# Altium PCB UC-453.PcbDoc
Units mil, origin at the board's own origin, x right, y up, seen from the top; angles counter-clockwise.
Board outline 4860.15 x 2910.09 mil, 2 copper layers (Top Layer, Bottom Layer); 73 components, 99 nets, 446 pads, 244 vias.
Unrouted connection lines stored in the file: 220.
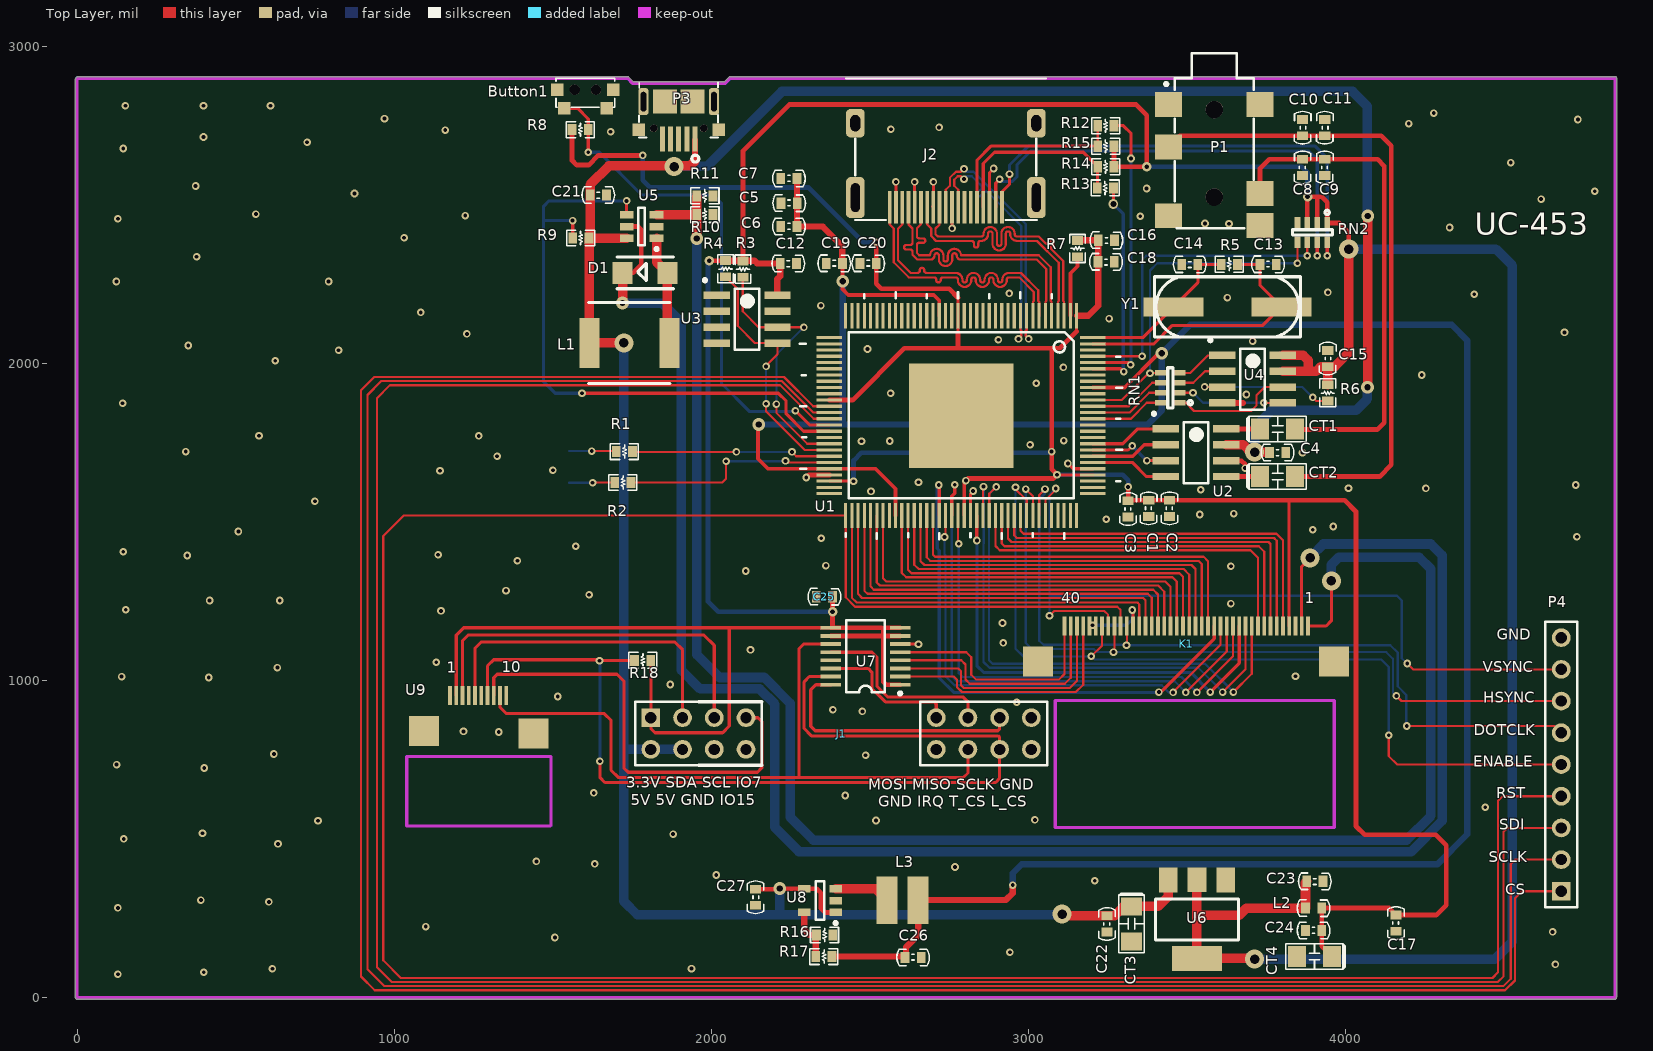
[diagram p0: Top Layer view]
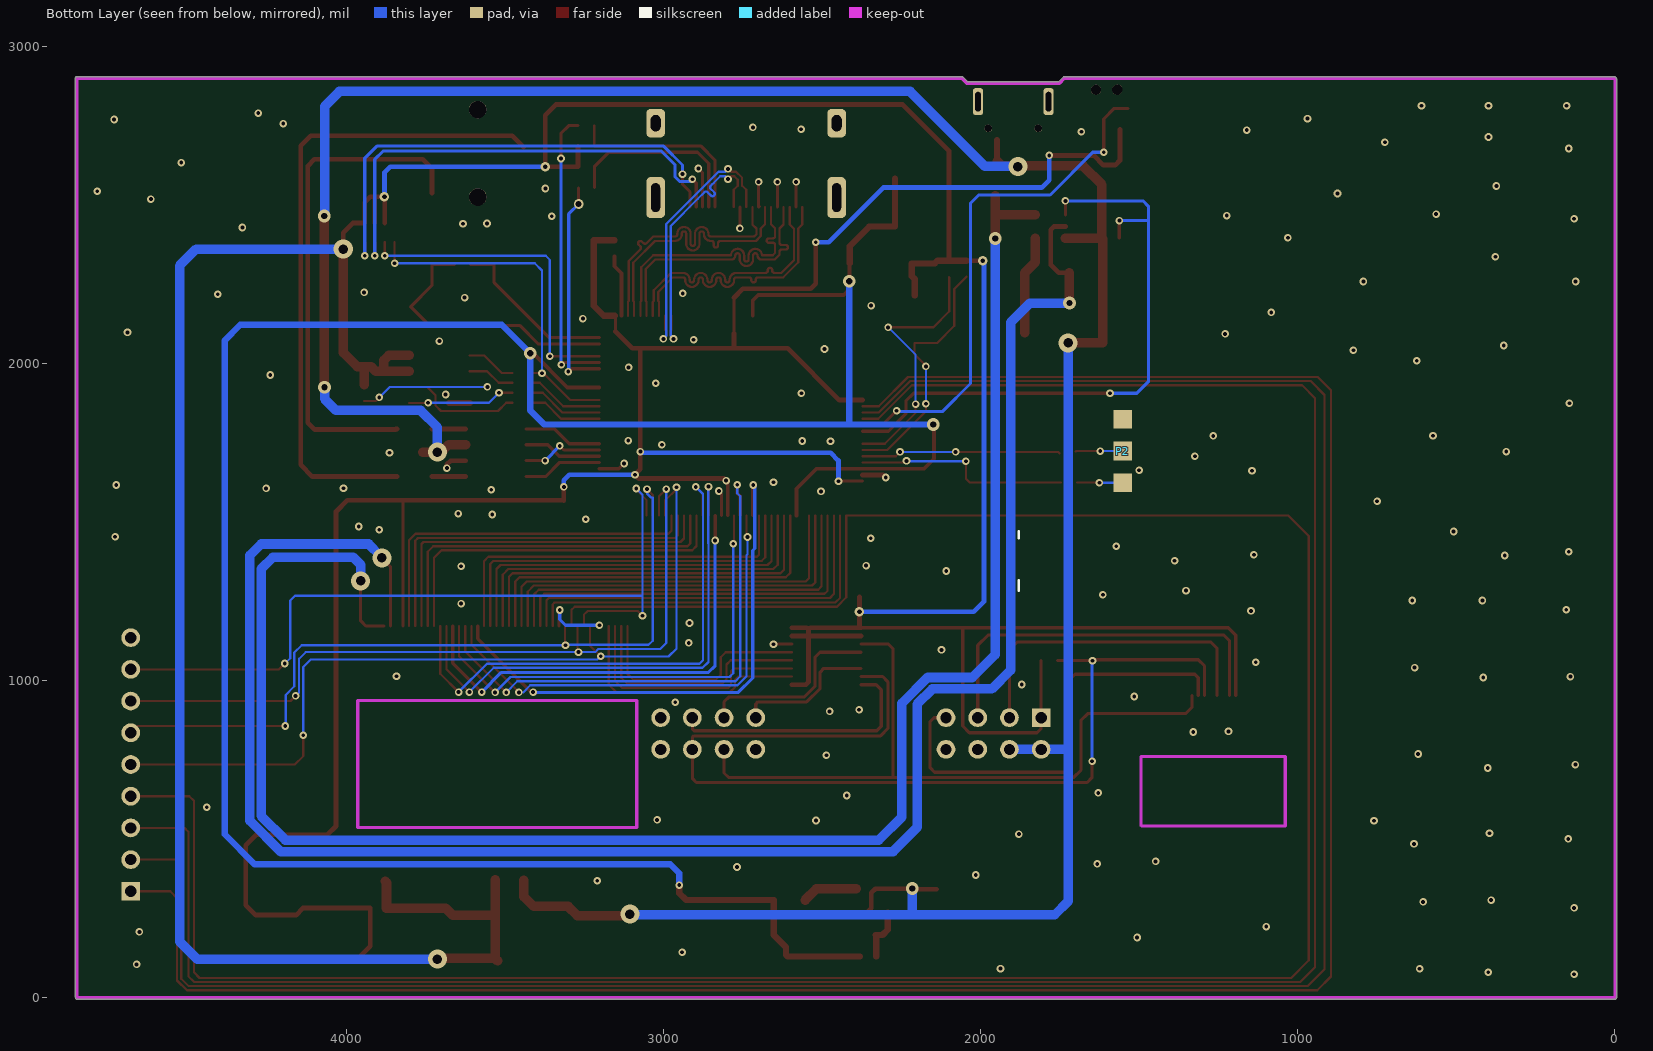
[diagram p1: Bottom Layer view, seen from below]
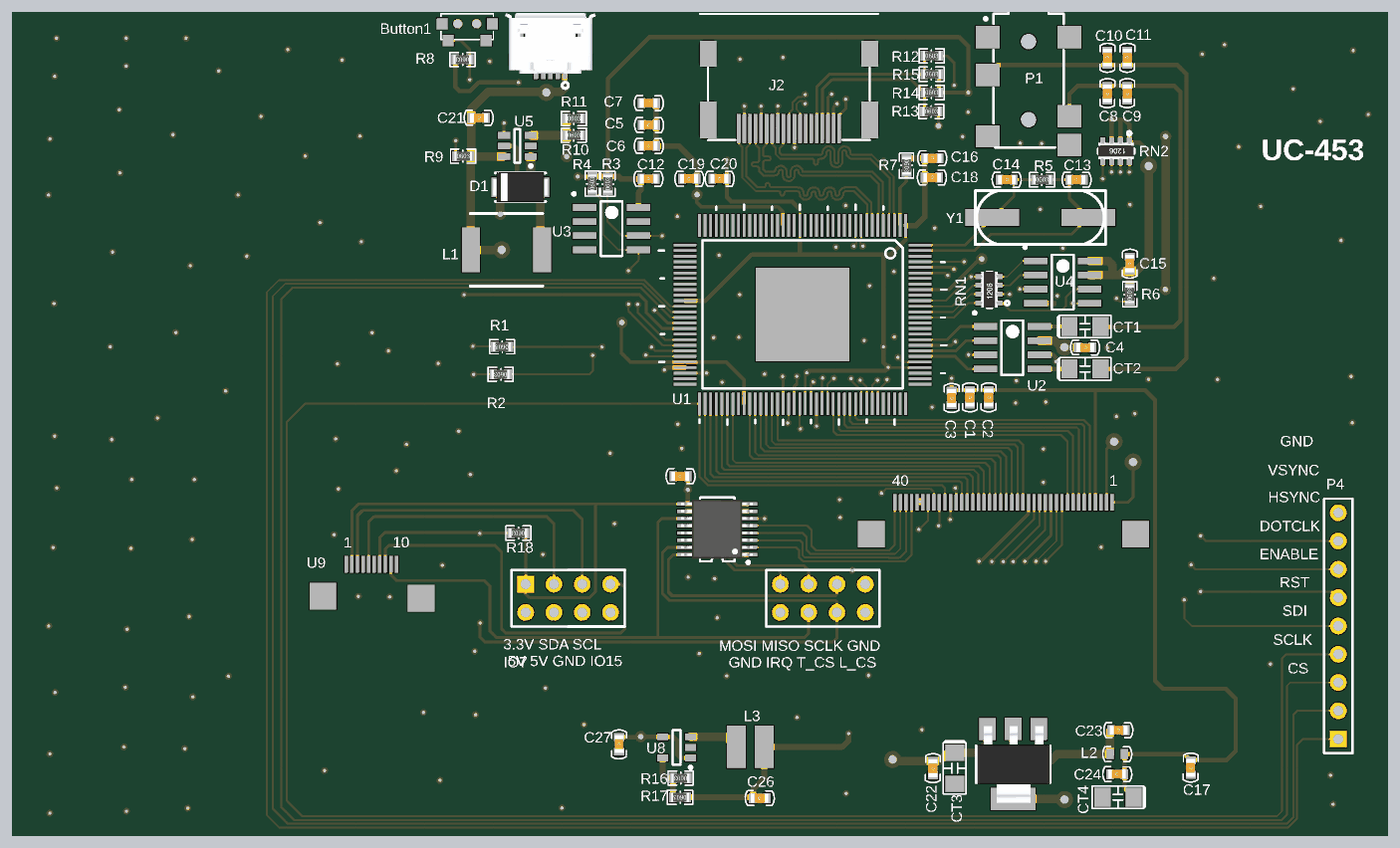
[diagram p2: 3D render of the assembled board from above, using the file's embedded part models]

## Layer stack, top to bottom
Top Layer: signal copper 1.4
Dielectric: core 12.6, FR-4, Dk 4.8
Bottom Layer: signal copper 1.4

## Board outline
-3.53,-3.56 cw(c0,0) -5.01,0 -5.01,2896.85 cw(c0,2896.85) -3.53,2900.41 -3.55,2900.4 -1.51,2902.43 -1.53,2902.41 cw(c2.03,2898.88) 2.03,2903.9 1735.96,2903.9 cw(c1735.96,2898.88) 1739.52,2902.41 1739.5,2902.43 1753.62,2888.32 2041.94,2888.32 2056.05,2902.43 2056.04,2902.41 cw(c2059.6,2898.88) 2059.6,2903.9 4850.12,2903.9 cw(c4850.12,2898.88) 4855.13,2898.88 cw(c4850.12,2898.88) 4855.02,2897.79 4855.02,0 cw(c4850,0) 4853.53,-3.56 4853.55,-3.55 4852.36,-4.73 4852.38,-4.71 cw(c4848.82,-1.18) 4848.82,-6.2 1.18,-6.2 cw(c1.18,-1.18) -2.38,-4.71 -2.36,-4.73

## Design rules (kind name [scope] priority, off if disabled: settings)
Clearance 铺铜安全间距 [InPolygon] p1: gap=12
Clearance [All] p2: gap=6
ComponentClearance [All] p1 off: gap=10 collisioncheckmode=3 verticalgap=10 showdistances=FALSE
DiffPairsRouting [All] p1: maxlimit=7 minlimit=7 mostfreqgap=7 maxuncoupledlength=500
MinimumSolderMaskSliver [All] p1: minsoldermaskwidth=6
PlaneClearance [All] p1: clearance=12
PlaneConnect [All] p1: planeconnectstyle=Direct reliefexpansion=20 reliefentries=4 reliefconductorwidth=10 reliefairgap=10
PolygonConnect VIA [IsVia] p1: connectstyle=Direct reliefconductorwidth=10 reliefentries=4 polygonreliefangle="90 Angle"
PolygonConnect PAD [All] p2: connectstyle=Relief reliefconductorwidth=20 reliefentries=4 polygonreliefangle="90 Angle"
RoutingVias [All] p1: holewidth=12 width=24 viastyle="Through Hole" minholewidth=1 minwidth=1 maxholewidth=100 maxwidth=100
SilkToSilkClearance [All] p1 off: silktosilkclearance=10
SilkscreenOverComponentPads [IsPad] p1 off: minsilkscreentomaskgap=10
SolderMaskExpansion [All] p1: expansion=4
Width [All] p1: maxlimit=80 minlimit=7 preferedwidth=7
21 further rules are at their usual default settings.

## Classes and differential pairs
component class power: Button1 C21 C22 C23 C24 C25 C26 C27 CT3 CT4 D1 J1 J2 K1 L1 L2 L3 P3 P4 R8 R9 R10 R11 R12 R13 R14 R15 R16 R17 R18 U5 U6 U7 U8 U9
component class mcu: C1 C2 C3 C4 C5 C6 C7 C8 C9 C10 C11 C12 C13 C14 C15 C16 C17 C18 C19 C20 CT1 CT2 P1 P2 R1 R2 R3 R4 R5 R6 R7 RN1 RN2 U1 U2 U3 U4 Y1
differential pair HDMI_TX2: +HDMI_TX2_P -HDMI_TX2_N
differential pair HDMI_TX1: +HDMI_TX1_P -HDMI_TX1_N
differential pair HDMI_TX0: +HDMI_TX0_P -HDMI_TX0_N
differential pair HDMI_CLK: +HDMI_CLK_P -HDMI_CLK_N

## Components (designator, comment, footprint, x,y, rotation, side; value= is the part's Value field where it differs from the comment)
Button1 "轻触开关_侧按_2mmX4mm" 轻触开关_侧按_2mmX4mm 1603.12,2862.88 r0 top
C1 "0.1uF" 0603S-CAP 3379.7,1542.71 r90 top
C2 "0.1uF" 0603S-CAP 3445.65,1542.71 r90 top
C3 "0.1uF" 0603S-CAP 3314.82,1540.51 r90 top
C4 "0.1uF" 0603S-CAP 3786.12,1718.88 r180 top
C5 "0.1uF" 0603S-CAP 2245.87,2504.92 r0 top
C6 "0.1uF" 0603S-CAP 2244.88,2431.1 r0 top
C7 "0.1uF" 0603S-CAP 2244.88,2582.68 r0 top
C8 "0.1u NOP" 0603S-CAP 3865.1,2617.88 r90 top
C9 "0.1u NOP" 0603S-CAP 3935.1,2617.88 r90 top
C10 "0.1u NOP" 0603S-CAP 3865.1,2742.88 r270 top
C11 "0.1u NOP" 0603S-CAP 3935.1,2742.88 r270 top
C12 "0.1uF" 0603S-CAP 2243.12,2314.88 r180 top
C13 "22pF" 0603S-CAP 3756.12,2311.88 r0 top
C14 "22pF" 0603S-CAP 3509.12,2311.88 r180 top
C15 "1uF" 0603S-CAP 3944.12,2014.88 r270 top
C16 "1uF" 0603S-CAP 3246.12,2387.88 r180 top
C17 "1uF" 0603S-CAP 4159.45,234.25 r90 top
C18 "1uF" 0603S-CAP 3245.12,2319.88 r180 top
C19 "0.1uF" 0603S-CAP 2388.12,2314.9 r0 top
C20 "0.1uF" 0603S-CAP 2495.12,2314.9 r0 top
C21 "1u" 0603S-CAP 1643.78,2530.87 r180 top
C22 "1u" 0603S-CAP 3248.53,231.95 r90 top
C23 "1u" 0603S-CAP 3903.54,366.14 r180 top
C24 "1u" 0603S-CAP 3899.8,210.83 r0 top
C25 "0.1uF" 0603S-CAP 2357.09,1263.78 r0 top
C26 "10uF" 0603S-CAP 2636.81,125.98 r0 top
C27 "4.7uF/6V3" 0603S-CAP 2139.76,315.94 r270 top
CT1 "10uF/16V" 钽电容（A型） 3786.12,1792.87 r0 top
CT2 "10uF/16V" 钽电容（A型） 3786.12,1642.87 r0 top
CT3 "10uF/16V" 钽电容（A型） 3325.53,231.95 r270 top
CT4 "10uF/16V" 钽电容（A型） 3902.48,129.18 r180 top
D1 "1N5819" SMA 1717.8,2285.2 r0 top
J1 "RASPBERRY PI" HDR2X20 2759.65,832.32 r0 top locked (schematic designator P2)
J2 "47151-1051" 47151-1051 2739.96,2624.88 r180 top
K1 "Con" "ER-TFT028-4 -B" 3497.83,1171.26 r0 top locked
L1 "CDRH74-220R" "CDRH74-220R 7*7*4" 1741.93,2063.98 r270 top
L2 "磁珠" L0603 3899.8,281.69 r0 top
L3 "LPS4018-472MLC" LVF404015N 2603.35,307.09 r180 top
P1 "Header 4" PJ-342 3586.42,2799.88 r270 top
P2 "Header 3" smt1X3 1551.97,1623.03 r90 bottom
P3 "micro USB" FCI_10118194-0001 1897.44,2719.88 r180 top
P4 "Header 9" HDR1X9 4680.91,334.65 r90 top
R1 "33" 0603S-RES 1726.18,1721.46 r180 top
R2 "33" 0603S-RES 1721.26,1624.02 r180 top
R3 "4.7K" 0603S-RES 2100.15,2297.21 r90 top
R4 "4.7K" 0603S-RES 2045.15,2298.21 r90 top
R5 "1M" 0603S-RES 3634.12,2311.88 r0 top
R6 "10K" 0603S-RES 3944.12,1906.88 r90 top
R7 "1K" 0603S-RES 3155.12,2361.88 r270 top
R8 "4.7K" 0603S-RES 1586.71,2736.88 r180 top
R9 "4.7K" 0603S-RES 1588.79,2395 r0 top
R10 "20_1%" 0603S-RES 1980.2,2468.87 r0 top
R11 "20_1% NC" 0603S-RES 1980.2,2527.87 r0 top
R12 "33" 0603S-RES 3244.3,2749.4 r0 top
R13 "33" 0603S-RES 3242.79,2553 r0 top
R14 "10K" 0603S-RES 3244.3,2620.07 r0 top
R15 "10K_NOP" 0603S-RES 3244.3,2684.73 r0 top
R16 "100K" 0603S-RES 2357.28,196.85 r180 top
R17 "200K" 0603S-RES 2355.32,128.94 r180 top
R18 "1K" 0603S-RES 1783.79,1063 r180 top
RN1 "22*4" NC06-4 3477.95,1875.28 r90 top
RN2 "4.7k*4(2.2k*4)" NC06-4 3943.12,2442.88 r180 top
U1 "RTD2660H" LQFP128_P0_5_22X16_EPAD 2788.12,1834.88 r180 top locked
U2 "CS4334-KSZ" SOIC-8N 3529.12,1717.88 r0 top
U3 "24LC16B-I/SN" SOIC-8N 2113.12,2138.88 r0 top
U4 "W25X40BVSNIG" SOIC-8N 3707.12,1949.88 r0 top
U5 "PT4103" SOT23-6N 1780.44,2431.21 r180 top
U6 "AMS1117-3.3V" SOT-223 3531.73,123.11 r0 top
U7 "XPT2046" ADS7843 2595.79,986.39 r270 top
U8 "NCP1529ASNT1G" SOT23-5 2343.14,305.34 r0 top locked
U9 "FT5216" FT5216 1170.08,982.28 r0 top locked
Y1 "27MHZ" XTAL-SMT 3628.12,2177.88 r180 top

## Footprints (in the part's own frame and the unit in brackets; to place one, negate y for a bottom-side part, rotate by r counter-clockwise, add the part's x,y. Pads: shape width x height; smd on the part's side, far side on the other; paste and mask are expansions set on the pad)
0603S-CAP [mm]
  rect 0.7x0.9 smd: 1(-0.65,0) 2(0.65,0)
  silkscreen extent -1.31,-0.67 1.31,0.67, body extent -0.83,-0.4 0.77,0.41, height 0.88
0603S-RES [mm]
  rect 0.7x0.9 smd: 1(-0.65,0) 2(0.65,0)
  silkscreen extent -1.12,-0.64 1.12,0.64, body extent -0.79,-0.39 0.81,0.41, height 0.45
47151-1051 [mm]
  rect 0.3x2.6 smd paste+0.013: 1(4.5,3.36) 2(4,3.36) 3(3.5,3.36) 4(3,3.36) 5(2.5,3.36) 6(2,3.36) 7(1.5,3.36) 8(1,3.36) 9(0.5,3.36) 10(0,3.36) 11(-0.5,3.36) 12(-1,3.36) 13(-1.5,3.36) 14(-2,3.36) 15(-2.5,3.36) 16(-3,3.36) 17(-3.5,3.36) 18(-4,3.36) 19(-4.5,3.36)
  rrect50% 1.5x2.3 hole 0.8 slot 1.3 at 90 deg paste+0.013: 20(-7.25,-3.36) 21(7.25,-3.36)
  rect 1.5x2.3 on Top Paste paste+0.013: 20(-7.25,-3.36) 21(7.25,-3.36)
  rrect50% 1.5x3.3 hole 0.7 slot 2.3 at 90 deg paste+0.013: 22(-7.25,2.6) 23(7.25,2.6)
  rect 1.5x3.3 on Top Paste paste+0.013: 22(-7.25,2.6) 23(7.25,2.6)
  silkscreen extent -8,-6.95 8,4.39
ADS7843 [mm]
  rect 0.3x1.65 smd: 1(0,0) 2(-0.65,0) 3(-1.3,0) 4(-1.95,0) 5(-2.6,0) 6(-3.25,0) 7(-3.9,0) 8(-4.55,0) 9(-4.55,-5.55) 10(-3.9,-5.55) 11(-3.25,-5.55) 12(-2.6,-5.55) 13(-1.95,-5.55) 14(-1.3,-5.55) 15(-0.65,-5.55) 16(0,-5.55)
  silkscreen extent -5.15,-4.33 0.82,0.13, body extent -4.94,-6.02 0.36,0.43, height 1.65
"CDRH74-220R 7*7*4" [mm] "6.0×6.0×4.5"
  rect 4x1.6 smd: 1(0,-3.2) 2(0,3.2)
  silkscreen extent -3.25,-3.25 3.25,3.25
"ER-TFT028-4 -B" [mm]
  rect 0.3x1.5 smd: 1(9.75,0) 2(9.25,0) 3(8.75,0) 4(8.25,0) 5(7.75,0) 6(7.25,0) 7(6.75,0) 8(6.25,0) 9(5.75,0) 10(5.25,0) 11(4.75,0) 12(4.25,0) 13(3.75,0) 14(3.25,0) 15(2.75,0) 16(2.25,0) 17(1.75,0) 18(1.25,0) 19(0.75,0) 20(0.25,0) 21(-0.25,0) 22(-0.75,0) 23(-1.25,0) 24(-1.75,0) 25(-2.25,0) 26(-2.75,0) 27(-3.25,0) 28(-3.75,0) 29(-4.25,0) 30(-4.75,0) 31(-5.25,0) 32(-5.75,0) 33(-6.25,0) 34(-6.75,0) 35(-7.25,0) 36(-7.75,0) 37(-8.25,0) 38(-8.75,0) 39(-9.25,0) 40(-9.75,0)
  rect 2.4x2.4 smd: ""(-11.85,-2.85) ""(11.85,-2.85)
FCI_10118194-0001 [mm] "FCI_101181"
  rect 0.4x2 smd: 1(-1.3,0.33) 2(-0.65,0.33) 3(0,0.33) 4(0.65,0.33) 5(1.3,0.33)
  rect 1x1 smd: 6(-3.2,-0.425) 6(3.2,-0.425)
  rrect50% 0.8x2.15 hole 0.45 slot 1.55 at 90 deg: 6(-2.825,-2.675) 6(2.825,-2.675)
  rect 0.8x2.15 on Top Paste: 6(-2.825,-2.675) 6(2.825,-2.675)
  rect 1.9x1.9 smd: 6(-1.1,-2.675) 6(1.1,-2.675)
  round 0.6 hole 0.6 unplated: 7(-2,-0.525) 7(2,-0.525)
  silkscreen extent -3.16,-4.23 3.19,2.17, body extent -4.1,-4.6 4.1,0.82, height 2.68
FT5216 [mm]
  rect 0.3x1.5 smd: 1(0.156,-0.762) 2(0.656,-0.762) 3(1.156,-0.762) 4(1.656,-0.762) 5(2.156,-0.762) 6(2.656,-0.762) 7(3.156,-0.762) 8(3.656,-0.762) 9(4.156,-0.762) 10(4.656,-0.762)
  rect 2.4x2.4 smd: ""(-1.944,-3.612) ""(6.858,-3.81)
HDR1X9 [mm] "Connector; Header; 9 Position"
  rect 1.5x1.5 hole 0.9: 1(0,0)
  round 1.5 hole 0.9: 2(2.54,0) 3(5.08,0) 4(7.62,0) 5(10.16,0) 6(12.7,0) 7(15.24,0) 8(17.78,0) 9(20.32,0)
  silkscreen extent -1.27,-1.27 21.59,1.27
HDR2X20 [mm] "Connector; Header; 20x2 Posi"
  rect 1.5x1.5 hole 0.9: 1(-24.13,1.27)
  round 1.5 hole 0.9: 2(-24.13,-1.27) 3(-21.59,1.27) 4(-21.59,-1.27) 5(-19.05,1.27) 6(-19.05,-1.27) 7(-16.51,1.27) 8(-16.51,-1.27) 19(-1.27,1.27) 20(-1.27,-1.27) 21(1.27,1.27) 22(1.27,-1.27) 23(3.81,1.27) 24(3.81,-1.27) 25(6.35,1.27) 26(6.35,-1.27)
  silkscreen extent -25.4,-2.54 7.62,2.54
L0603 [mm]
  rect 0.7x0.9 smd: 1(0.65,0) 2(-0.65,0)
  silkscreen extent -1.31,-0.67 1.31,0.67
LQFP128_P0_5_22X16_EPAD [mil]
  rect 10x80 smd: 1(-364.17,-314.96) 2(-344.49,-314.96) 3(-324.8,-314.96) 4(-305.12,-314.96) 5(-285.43,-314.96) 6(-265.75,-314.96) 7(-246.06,-314.96) 8(-226.38,-314.96) 9(-206.69,-314.96) 10(-187.01,-314.96) 11(-167.32,-314.96) 12(-147.64,-314.96) 13(-127.95,-314.96) 14(-108.27,-314.96) 15(-88.58,-314.96) 16(-68.9,-314.96) 17(-49.21,-314.96) 18(-29.53,-314.96) 19(-9.84,-314.96) 20(9.84,-314.96) 21(29.53,-314.96) 22(49.21,-314.96) 23(68.9,-314.96) 24(88.58,-314.96) 25(108.27,-314.96) 26(127.95,-314.96) 27(147.64,-314.96) 28(167.32,-314.96) 29(187.01,-314.96) 30(206.69,-314.96) 31(226.38,-314.96) 32(246.06,-314.96) 33(265.75,-314.96) 34(285.43,-314.96) 35(305.12,-314.96) 36(324.8,-314.96) 37(344.49,-314.96) 38(364.17,-314.96) 65(364.17,314.96) 66(344.49,314.96) 67(324.8,314.96) 68(305.12,314.96) 69(285.43,314.96) 70(265.75,314.96) 71(246.06,314.96) 72(226.38,314.96) 73(206.69,314.96) 74(187.01,314.96) 75(167.32,314.96) 76(147.64,314.96) 77(127.95,314.96) 78(108.27,314.96) 79(88.58,314.96) 80(68.9,314.96) 81(49.21,314.96) 82(29.53,314.96) 83(9.84,314.96) 84(-9.84,314.96) 85(-29.53,314.96) 86(-49.21,314.96) 87(-68.9,314.96) 88(-88.58,314.96) 89(-108.27,314.96) 90(-127.95,314.96) 91(-147.64,314.96) 92(-167.32,314.96) 93(-187.01,314.96) 94(-206.69,314.96) 95(-226.38,314.96) 96(-246.06,314.96) 97(-265.75,314.96) 98(-285.43,314.96) 99(-305.12,314.96) 100(-324.8,314.96) 101(-344.49,314.96) 102(-364.17,314.96)
  rect 80x10 smd: 39(415.35,-246.06) 40(415.35,-226.38) 41(415.35,-206.69) 42(415.35,-187.01) 43(415.35,-167.32) 44(415.35,-147.64) 45(415.35,-127.95) 46(415.35,-108.27) 47(415.35,-88.58) 48(415.35,-68.9) 49(415.35,-49.21) 50(415.35,-29.53) 51(415.35,-9.84) 52(415.35,9.84) 53(415.35,29.53) 54(415.35,49.21) 55(415.35,68.9) 56(415.35,88.58) 57(415.35,108.27) 58(415.35,127.95) 59(415.35,147.64) 60(415.35,167.32) 61(415.35,187.01) 62(415.35,206.69) 63(415.35,226.38) 64(415.35,246.06) 103(-415.35,246.06) 104(-415.35,226.38) 105(-415.35,206.69) 106(-415.35,187.01) 107(-415.35,167.32) 108(-415.35,147.64) 109(-415.35,127.95) 110(-415.35,108.27) 111(-415.35,88.58) 112(-415.35,68.9) 113(-415.35,49.21) 114(-415.35,29.53) 115(-415.35,9.84) 116(-415.35,-9.84) 117(-415.35,-29.53) 118(-415.35,-49.21) 119(-415.35,-68.9) 120(-415.35,-88.58) 121(-415.35,-108.27) 122(-415.35,-127.95) 123(-415.35,-147.64) 124(-415.35,-167.32) 125(-415.35,-187.01) 126(-415.35,-206.69) 127(-415.35,-226.38) 128(-415.35,-246.06)
  rect 330x330 smd: 129(0,0)
  silkscreen extent -508,-389 508,390
LVF404015N [mm] "Precision Wire Wound Inductor, 2-Leads, Body 4.0x4.0mm, IPC Medium Density"
  rect 1.7x3.8 smd: 1(-1.25,0) 2(1.25,0)
  body extent -2,-2 2,2, height 2
NC06-4 [mil]
  rect 18x36 smd: 1(0.4,0.16) 2(31.9,0.16) 3(63.39,0.16) 4(94.4,0.16) 5(94.4,61.16) 6(63.39,61.16) 7(31.9,61.16) 8(0.4,61.16)
  silkscreen extent -16,-40 110,38, body extent -15,-2 111,61, height 20
PJ-342 [mm]
  rect 2x2.15 smd: 1(-0.4,-3.675) 2(6.7,3.675) 3(3,-3.675) 4(-0.4,3.675) 10(9.3,3.675) 11(8.5,-3.675)
  round 1.4 hole 1.4 unplated: MH1(0,0) MH2(7,0)
  silkscreen extent -4.5,-3.97 9.5,3.15, body extent -4.45,-3 9.52,3, height 4.87
SMA [mm]
  rect 1.6x1.75 smd: A(3.655,0) K(0.075,0)
  silkscreen extent -0.38,-1.28 4.13,1.28, body extent -0.64,-1.35 4.36,1.35, height 2.15
smt1X3 [mm] "Connector; Header; 3 Position"
  rect 1.5x1.5 smd: 1(0,0) 2(2.54,0) 3(5.08,0)
SOIC-8N [mm] "SOIC, 8-Leads, Body 4.9x3.9mm (max), Pitch 1.27mm, IPC Medium Density"
  rect 2.1x0.6 smd: 1(-2.425,1.905) 2(-2.425,0.635) 3(-2.425,-0.635) 4(-2.425,-1.905) 5(2.425,-1.905) 6(2.425,-0.635) 7(2.425,0.635) 8(2.425,1.905)
  silkscreen extent -3.5,-2.45 0.98,3.25, body extent -1.95,-2.45 1.95,2.45, height 1.75
SOT23-5 [mm] "SOT23, 5-Leads, Body 3.1x3.0mm (max), Pitch 0.95mm, IPC Medium Density"
  rect 1x0.6 smd: 1(1.25,-0.95) 2(1.25,0) 3(1.25,0.95) 4(-1.25,0.95) 5(-1.25,-0.95)
  silkscreen extent -0.35,-1.92 1.38,1.55, body extent -0.9,-1.55 0.9,1.55, height 1.1
SOT23-6N [mm] "SOT23, 6-Leads, Body 3.0x3.0mm (max), Pitch 0.95mm, IPC Medium Density"
  rect 1.1x0.6 smd: 1(-1.2,0.95) 2(-1.2,0) 3(-1.2,-0.95) 4(1.2,-0.95) 5(1.2,0) 6(1.2,0.95)
  silkscreen extent -1.33,-1.5 0.25,1.92, body extent -0.85,-1.5 0.85,1.5, height 1.45
SOT-223 [mm] "TSOP, 44-Leads, Body 18.4x10.2mm (max), Pitch 0.80mm, IPC Mediu"
  rect 1.5x2 smd: 1(2.3,6.275) 2(0,6.3) 3(-2.3,6.275)
  rect 4x2 smd: 2(0,0)
  silkscreen extent -3.32,1.48 3.32,4.75, body extent -3.2,-0.36 3.3,6.54, height 1.72
XTAL-SMT [mil]
  rect 190x60 smd: 1(-170,0) 2(170,0)
  silkscreen extent -230,-95 230,95
轻触开关_侧按_2mmX4mm [mm]
  round 0.8 hole 0.82: 0(-0.85,0) 0(0.85,0)
  rect 1x1 smd: 1(-2.25,0) 2(2.25,0) 3(-1.7,-1.5) 4(1.7,-1.5)
  silkscreen extent -2.35,-1.4 2.35,0.9, body extent -2.16,-1.52 2.16,1.52, height 0.76
钽电容（A型） [mm]
  rect 1.45x1.7 smd: 1(-1.397,0) 2(1.397,0)
  silkscreen extent -2.46,-1.02 2.31,1.02

## Part data
C1 C2 C3 C4 C5 C6 C7 C8 C9 C10 C11 C13 C14 C15 C16 C17 C18 C19 C20 C21 C23 C24 C25: library part Cap, "50V/8.2u/0805"
C12: library part "CAP SMT 0.1uF 16V X7R", "CAP SMT 0.1uF 16V X7R"
C22 C26 C27: library part Cap, "Capacitor"
CT1 CT2 CT3 CT4: library part "Cap Pol2", "Polarized Capacitor (Axial)"
D1: library part "Diode BAT17", "Silicon RF Schottky Diode for Mixer Applications in the VHF/UHF Range"
J2: library part CON_HDMI_RA, "HDMI Con, RA, SMT with PTH lugs"
L1 L3: library part Inductor, "Inductor"
L2: library part RES
P1: "Header, 4-Pin"
P2: "Header, 3-Pin"
P3: library part 0481900001, "Connector Receptacle USB - micro AB 2.0 5 Position Through Hole, Vertical"
P4: "Header, 9-Pin"
R1 R2 R3 R4 R5 R6 R7 R8 R9 R10 R11 R12 R13 R14 R15 R16 R17 R18: library part Res2, "Resistor"
RN1 RN2: library part RN4
U1: library part RTD2523_10
U3: library part 24LC64-I/SN, "IC EEPROM 64KBIT 400KHZ 8SOIC"
U4: library part 24C08_1
U6: library part AMS1117
U7: library part ADS7843
Y1: library part "XTAL 32.768KHZ", "Crystal, CRYSTAL 32.768KHZ 6PF SMD"

## Via types
v1: diameter 24, hole 12, Top Layer to Bottom Layer, tented both sides, 223 vias
v2: diameter 60, hole 30, Top Layer to Bottom Layer, tented both sides, 8 vias
v3: diameter 40, hole 20, Top Layer to Bottom Layer, tented both sides, 8 vias
v4: diameter 30, hole 15, Top Layer to Bottom Layer, tented both sides, 4 vias
v5: diameter 30, hole 20, Top Layer to Bottom Layer, tented both sides, 1 vias

## Nets (pads, with @x,y where several pads share a name; then routed paths per layer and width w, separated by ;. In a path a pad name is that pad's centre, name@x,y a point inside that pad or via, vN(x,y) a via of type N, cw(c..) or ccw(c..) an arc to the next point about the centre after c; other vN are vias at no path point)
1V8_VCC: C5.2 C6.2 C7.2 C19.2 C26.1 L3.1 R17.1 U1.23 U1.60 U1.73 U1.120 | length 8499.3
  Top Layer w12: v3(2149.41,1807.09) 2147.71,1805.39 2147.71,1698.75 2178.9,1667.56 U1.60 2518.27,1667.56 2581.43,1604.4 U1.73 ; v3@2413.71,2241.87 2413.71,2233.73 2431.91,2215.53 2701.86,2215.53 2719.22,2198.17 U1.23 ; v3@2413.71,2259.12 C19.2 ; U1.120 3303.91,1923.47 v3@3412.33,2031.88
  Top Layer w20: C7.2 C6.2 2352.17,2431.1 2413.71,2369.56 C19.2 ; R17.1 2608.27,128.94 2614.17,134.84 2614.17,158.46 2652.56,196.85 L3.1 2929.13,307.09 2950.79,328.74 v1(2950.79,354.33)
  Bottom Layer w20: v3(2149.41,1807.09) 3376.97,1807.09 3421.06,1851.18 v3(3421.06,2031.88) 3510.24,2121.06 4335.63,2121.06 4384.84,2071.85 4384.84,514.76 4290.35,420.28 2979.33,420.28 2950.79,391.73 v1(2950.79,354.33) ; 2415.16,1815.22 v3(2415.16,2259.12)
3V3_VCC: C1.2 C2.2 C3.2 C16.2 C17.2 C18.2 C20.2 C24.2 CT4.1 K1.4 L2.1 R7.1 R8.2 U1.1 U1.20 U1.49 U1.62 U1.84 U1.106 | length 8264.7
  Top Layer w10: U1.62 v1(2448.86,1628.19) ; 2778.28,2094.49 U1.20 2778.28,2206.69 ; U1.84 2797.96,1624.73 v1(2803.15,1629.92) ; v1@3091.3,1647.88 U1.106 ; 3152.29,2100.32 U1.1 ; K1.4 3822.64,1567.15
  Top Layer w15: R8.2 1561.12,2639.47 1575.59,2625 1613.98,2625 1644.49,2655.51 v1(1784.25,2655.51) ; U1.49 2445.91,1884.1 2609.06,2047.24 3073.62,2047.24 ; v1(2520.71,2381.65) C20.2 2520.71,2250.75 2536.43,2235.03 2749.94,2235.03 2778.28,2206.69 ; 2778.28,2049.28 2778.28,2094.49 ; v1(2803.15,1629.92) 2809.73,1636.5 3078.43,1636.5 v1(3090.55,1648.62) ; v1@3091.3,1647.88 v1(3090.55,1648.62) ; 3152.29,2100.32 3099.21,2047.24 3073.62,2047.24 ; C3.2 v1(3314.82,1610.24) ; C3.2@3317.02,1568.3 C1.2 C2.2 3997.65,1568.3 4033.47,1532.48 4033.47,540.35 4061.02,512.8 4284.45,512.8 4317.91,479.33 4317.91,291.34 4286.42,259.84 C17.2 4137.6,281.69 L2.1 C24.2 3925.39,161.27 CT4.1 ; 3073.62,2047.24 v1(3073.62,1721.46) 3073.62,1665.55 v1(3090.55,1648.62)
  Top Layer w20: U1.1@3154.61,2149.84 3189.02,2149.84 3220.12,2180.94 3220.12,2387.47 R7.1
  Bottom Layer w15: v1(1784.25,2655.51) 1784.25,2577.95 1808.07,2554.13 2306.89,2554.13 2479.37,2381.65 v1(2520.71,2381.65) ; v1(2448.86,1628.19) 2448.86,1692.95 2473.43,1717.52 2995.21,1717.52 3069.67,1717.5 v1(3073.62,1721.46) ; v1(3090.55,1648.62) 3297.24,1648.62 3314.82,1631.05 v1(3314.82,1610.24)
3V3_VO: C12.2 C15.2 C23.2 C25.2 J1.1 L2.2 R3.2 R4.2 R6.2 R14.2 R15.2 R18.1 RN2.1 RN2.2 RN2.3 U3.8 U4.7 U4.8 U6.2 U7.1 U7.7 U7.8 U7.9 U7.10 U9.2 | length 12879.3
  Top Layer w10: U9.2 1195.91,1142.12 1219.79,1166 2056.79,1166 ; R18.1@1809.65,1062.73 J1.1 1809.65,848.14 1822.79,835 2035.79,835 2056.79,856 2056.79,1166 ; U7.9@2382.68,1170.92 2377.76,1166 2056.79,1166
  Top Layer w15: v4(1993.79,2323) R4.2@2044.35,2323 ; R3.2 2100.15,2323.8 2100.15,2669.36 2246.73,2815.94 3339.85,2815.94 3373.55,2782.24 v4(3373.55,2620.07) R14.2 R15.2 ; U7.10 2543.56,1139.94 ; U7.9 2537.72,1165.53 ; U7.9@2382.68,1170.92 v4(2382.68,1216) C25.2 ; 2548.54,1139.94 U7.7 ; U7.1 2551.39,986.39 2543.62,994.17 2543.62,1159.62 2549.53,1165.53 U7.8 ; RN2.3 v4@3879.72,2523.88 ; v4(3880.71,2524.87) 3911.22,2524.87 ; RN2.2 3911.22,2524.87 ; v2(4010.63,2360.24) 4010.63,2411.68 3979.59,2442.72 RN2.1 3942.72,2507.15 3925,2524.87 3911.22,2524.87
  Top Layer w20: R4.2 2100.15,2323.8 2136.63,2323.8 2145.55,2314.88 C12.2 2217.53,2274.81 2208.59,2265.87 U3.8
  Top Layer w30: U6.2@3523.83,115.2 U6.2@3531.73,123.11 ; U6.2@3531.73,371.14 3531.73,259.57 ; v2@3711.54,123.11 U6.2@3531.73,123.11 ; U4.7 3908.62,1974.88 3923.03,1989.29 C15.2 ; U4.8 3866.93,2024.88 3882.69,2009.12 3882.69,1986.5 ; C23.2 3874.21,362.4 L2.2 3687.95,281.69 3665.83,259.57 3531.73,259.57 ; R6.2 C15.2 ; v2(4010.63,2360.24) 4010.63,2033.46 3966.46,1989.29 C15.2 ; U6.2@3531.73,123.11 3531.73,259.57
  Bottom Layer w15: v4@1989.79,2319 1989.79,1249 2022.79,1216 v4@2381.68,1216 ; v4(3373.55,2620.07) 3862.22,2620.07 3880.71,2601.57 v4(3880.71,2524.87)
  Bottom Layer w30: v2(3713.58,121.06) 4471.46,121.06 4526.57,176.18 4526.57,2308.07 4474.65,2360 4010.63,2360 v2@4012.63,2362
5V0: C4.2 C21.2 C22.2 C27.1 CT3.1 J1.2 J1.4 L1.1 P3.1 R9.2 U2.7 U5.6 U6.3 U8.1 U8.4 | length 9141.8
  Top Layer w15: C27.1 v3@2216.09,341.53 ; v3@2217.3,342.74 U8.4 2332.02,342.74 2345.24,329.52 2345.24,281.29 2358.6,267.94 U8.1
  Top Layer w20: 1948.62,2637.8 P3.1@1948.62,2703.6
  Top Layer w30: R9.2@1615.94,2392.72 L1.1 v2@1722.81,2063.98 ; U5.6 1623.2,2393.8 1618.19,2398.81 C21.2 1618.19,2563.27 1677.23,2622.31 1933.14,2622.31 1948.62,2637.8 ; v2(3106.3,262.8) 3111.56,257.54 C22.2 3272.2,257.54 3301.61,286.95 CT3.1 3409.93,286.95 3441.18,318.2 U6.3 ; U2.7 3678.44,1742.88 3702.44,1718.88 C4.2 ; v3(4069.69,1924.21) 4070.67,1925.2 v3(4070.67,2464.57)
  Bottom Layer w30: v2(1724.79,2064) 1724.79,302.77 1766.73,260.83 2216.54,260.83 ; 1725.61,782.32 J1.2 J1.4 ; v2(1882.68,2620.34) 1884.38,2622.05 1987.73,2622.05 2222.97,2857.28 4022.5,2857.28 4069.69,2810.1 v3@4069.69,2464.57 ; v3(2216.54,343.5) 2216.54,260.83 ; v2(3106.3,262.8) 3104.33,260.83 2216.54,260.83 ; v2(3713.39,1719.75) 3713.39,1798.03 3766.73,1851.38 4033.46,1851.38 4069.69,1887.6 v3(4069.69,1924.21)
#3-SDA-GPIO8: J1.3 U9.5 | length 1035.9
  Top Layer w10: U9.5 1254.96,1101.17 1274.79,1121 1884.79,1121 1909.65,1096.14 J1.3
#5-SCL-GPIO9: J1.5 U9.3 | length 1215.5
  Top Layer w10: U9.3 1215.59,1124.8 1233.79,1143 1976.79,1143 2009.65,1110.14 J1.5
#7-GPIO7: J1.7 U9.8 | length 1401.6
  Top Layer w10: U9.8 1314.02,1008.23 1324.79,1019 1702.79,1019 1724.79,997 1724.79,723 1737.79,710 2145.79,710 2159.65,723.86 2159.65,870.14 2147.47,882.32 J1.7
#8-GPIO15: J1.8
"#19 -MOSI-GPIO12": J1.19 U7.14 | length 453.8
  Top Layer w10: U7.14 2495.21,1037.57 2506.79,1026 2506.79,974.37 2549.16,932 2702.79,932 2709.65,925.14 J1.19 J1.19@2709.65,884.14
#21-MISO-GPIO13: J1.21 U7.12 | length 601
  Top Layer w10: U7.12 2507.03,1088.76 2522.79,1073 2522.79,981 2555.79,948 2793.79,948 2809.65,932.14 J1.21
#22-IRQ-GPIO6: J1.22 U7.11 U9.9 | length 2288.9
  Top Layer w10: U9.9 1333.7,915.09 1352.79,896 ; 1352.79,895.09 1662.7,895.09 1683.79,874 1683.79,717 1706.79,694 2276.79,694 ; U7.11 2291.13,1114.35 2276.79,1100 2276.79,694 ; J1.22 2809.65,707.86 2795.79,694 2276.79,694
#23-SCLK-GPIO14: J1.23 U7.16 | length 824.8
  Top Layer w10: U7.16 2330.18,986.39 2313.79,970 2313.79,855 2327.79,841 2903.79,841 2909.65,846.86 J1.23
#24-CE0-GPIO10: J1.24 R18.2 U7.15 U9.7 | length 3206.6
  Top Layer w10: U9.7 1294.33,1045.54 1313.79,1065 v1@1646.79,1065 ; v1@1648.79,740 1648.79,694 1664.79,678 2896.79,678 2909.65,690.86 J1.24 ; v1@1648.79,1063 R18.2 ; U7.15 2309.77,1011.98 2292.79,995 2292.79,848 2315.79,825 2904.79,825 2909.65,820.14 J1.24 ; J1.24@2918.37,773.59 J1.24
  Bottom Layer w10: v1(1648.79,745) v1@1648.79,1061
  other v1: 1647.79,1062
#26-CE1-GPIO11: J1.26
CE: RN1.4 U4.1 | length 156.7
  Top Layer w7: RN1.4@3477.95,1969.28 3511.15,1969.28 3566.75,2024.88 U4.1
CLK: RN1.1 U4.6 | length 383.1
  Top Layer w7: RN1.1@3477.95,1875.28 3496.83,1875.28 3522.44,1849.67 3702.56,1849.67 3719.29,1866.4 3719.29,1898.88 ; 3720.94,1900.53 3745.29,1924.88 U4.6
EE_CE: RN1.5 RN2.5 U1.118 | length 1113.5
  Top Layer w7: U1.118 3295.06,1884.1 3380.24,1969.28 RN1.5@3416.95,1969.28 ; v1(3848.72,2315.22) RN2.5
  Bottom Layer w7: v1(3383.66,1968.77) 3383.66,2292.58 3406.3,2315.22 v1(3848.72,2315.22)
EE_CLK: RN1.8 U1.115 | length 234.3
  Top Layer w7: U1.115 3323.6,1825.04 3373.84,1875.28 RN1.8@3416.95,1875.28
EE_SDIN: RN1.7 U1.116 | length 239.2
  Top Layer w7: U1.116 3319.66,1844.73 3381.72,1906.78 RN1.7@3416.95,1906.78
EE_SDOUT: RN1.6 U1.117 | length 244.1
  Top Layer w7: U1.117 3316.71,1864.41 3390.57,1938.28 RN1.6@3416.95,1938.28
GND: Button1.1 Button1.2 Button1.4 C1.1 C2.1 C3.1 C4.1 C5.1 C6.1 C7.1 C8.1 C9.1 C10.1 C11.1 C12.1 C13.2 C14.2 C15.1 C16.1 C17.1 C18.1 C19.1 C20.1 C21.1 C22.1 C23.1 C24.1 C25.1 C26.2 C27.2 CT3.2 CT4.2 J1.6 J1.20 J1.25 J2.2 J2.5 J2.8 J2.11 J2.17 J2.20@3025.39,2757.17 J2.21@2454.53,2757.17 J2.22@3025.39,2522.52 J2.23@2454.53,2522.52 K1.3 K1.29 K1.35 K1.36 P1.1 P1.4 P2.3 P3.5 P3.6@1771.46,2736.62 P3.6@1786.22,2825.2 P3.6@1854.13,2825.2 P3.6@1940.75,2825.2 P3.6@2008.66,2825.2 P3.6@2023.43,2736.62 P4.9 R10.2 R11.2 R16.1 RN2.4 U1.11 U1.38 U1.61 U1.85 U1.107 U1.129 U2.6 U3.1 U3.2 U3.3 U3.4 U3.7 U4.4 U5.2 U6.1 U7.6 U8.2 U9.1 U9.4 U9.6 U9.10 | length 1089.9
  Top Layer w10: J2.2 2582.48,2572.83 v1(2582.48,2571.85) ; U7.6 v1@2653.44,1114.35 ; J2.5 v1(2641.54,2571.85) ; J2.8 2698.62,2494.57 2700.59,2496.54 v1(2700.59,2571.85) ; v1(2759.65,2425.2) J2.11 ; U1.85 2817.65,1588.86 v1(2825.79,1597) ; J2.17 2877.76,2601.38 v1(2890.55,2614.17) ; v1(3124.8,1684.06) 3141.3,1667.56 U1.107 ; v1(3327.79,1222) 3330.51,1219.28 K1.29
  Top Layer w15: v1(2300,1639.76) 2308.11,1647.88 U1.61 ; U2.6 3672.08,1692.88 3683.86,1681.1 v1(3683.86,1669.29)
  Top Layer w20: U4.4 3675.87,1874.88
  Bottom Layer w10: v1(3202.79,1174) 3309.79,1174 3327.79,1192 v1(3327.79,1222)
  other v1: 128.74,72.83 399.41,79.72 615.94,90.55 1937.79,91 4662.2,104.33 2941.93,142.72 1506.89,188.98 4653.35,206.69 1099.41,223.43 128.74,282.48 605.12,301.18 390.55,307.09 3209.65,368.11 2015.79,386 2768.7,411.42 1632.79,421 1448.79,429 633.66,484.25 147.44,500 1879.79,515 395.47,517.72 759.79,557 2519.79,558 3020.79,560 4440.79,600 2422.79,637 1629.79,645 401.38,723.43 124.8,734.25 2486.79,764 620.87,767.72 1329.79,837 1218.79,839 2476.79,902 2383.79,907 2963.79,931 1515.79,949 1870.79,987 415.16,1008.86 140.55,1011.81 3842.79,1013 631.69,1040.35 1132.79,1057 2123.79,1096 2653.79,1114 2920.79,1118 2918.79,1181 1147.79,1219 153.35,1222.44 3638.79,1242 418.11,1251.97 639.57,1251.97 1614.79,1270 1352.79,1283 2108.79,1345 3638.79,1360 2361.79,1362 1388.79,1377 347.44,1393.7 1138.79,1396 145.67,1405.51 1572.79,1423 2346.79,1448 4730.12,1452.76 508.86,1469.49 3896.79,1475 3961.61,1485.24 3245.79,1508 3540.79,1523 3647.79,1526 750,1564.96 2503.79,1596 3543.79,1601 4253.94,1605.32 4009.79,1606 4726.18,1616.14 2653.54,1625 1144.79,1661 1500.79,1662.4 1324.79,1707 3864.79,1718 342.52,1721.46 3005.79,1743 2473.79,1754 2562.8,1754.92 3111.79,1756 573.82,1771.65 1266.79,1771 143.7,1874.02 3687.8,1901.57 2565.75,1905.51 3024.79,1937 4240.79,1963 3110.79,1987 625,2007.87 824.8,2041.34 2492.79,2045 350.39,2056.1 3707.48,2069.88 2905.79,2074 1229.33,2092.52 4690.94,2097.44 3254.79,2141 1083.66,2160.43 2345.79,2182 3627.79,2207 4406.5,2217.52 2939.76,2220.47 3944.88,2223.43 124.02,2257.87 793.31,2257.87 376.97,2335.63 1031.5,2395.67 4328.74,2428.15 3632.87,2439.96 3557.09,2440.94 128.94,2455.71 3353.35,2463.58 1224.41,2465.55 563.98,2470.47 4617.13,2517.72 875,2535.43 4786.42,2542.32 3373.03,2551.18 374.02,2559.06 4521.65,2632.87 145.67,2677.17 725.39,2696.85 398.62,2713.58 1682.79,2730 1161.42,2735.24 2566.79,2738 2718.79,2744 4199.8,2755.91 4733.27,2768.7 969.49,2771.65 4278.79,2789 152.56,2812.01 398.62,2812.01 610.24,2812.01
HDMI_5V: J2.18 RN2.7 | length 1514.8
  Top Layer w10: J2.18 2897.44,2568.17 v1@2908.76,2579.49 ; v1@3911.22,2339.83 RN2.7
  Bottom Layer w10: v1(2909.39,2580.12) 2915.8,2573.72 2950.27,2573.72 2964.37,2587.81 2964.37,2626.26 3007.04,2668.93 3885.2,2668.93 3911.22,2642.91 v1(3911.22,2338.84)
HDMI_CLK_N: J2.12 U1.10 | length 864.1
  Top Layer w7: J2.12 2779.33,2547.38 2766.65,2560.06 2766.65,2578.88 2777.65,2589.88 2788.12,2589.88 v1(2797.12,2580.88) ; v1(2968.97,2076.88) 2977.97,2085.88 2977.97,2102.53 2975.13,2105.38 U1.10
  Bottom Layer w7: v1(2797.12,2580.88) 2806.12,2589.88 2821.32,2589.88 2841.72,2569.48 2846.67,2564.53 2851.62,2559.58 cw(c2846.67,2554.63) 2851.62,2549.68 2840.87,2538.93 ccw(c2845.82,2533.98) 2840.87,2529.03 ccw(c2845.82,2533.98) 2850.77,2529.03 2861.52,2539.78 cw(c2866.47,2534.83) 2871.42,2539.78 2892.72,2518.48 2977.97,2433.23 2977.97,2085.88 v1(2968.97,2076.88)
HDMI_CLK_P: J2.10 U1.9 | length 864.1
  Top Layer w7: J2.10 2739.96,2547.38 2752.65,2560.06 2752.65,2584.68 2771.85,2603.88 2788.12,2603.88 v1(2797.12,2612.88) ; U1.9 2994.81,2105.38 2991.97,2102.53 2991.97,2085.88 v1(3000.97,2076.88)
  Bottom Layer w7: v1(2797.12,2612.88) 2806.12,2603.88 2827.12,2603.88 2991.97,2439.03 2991.97,2085.88 v1(3000.97,2076.88)
HDMI_PLUG_DET: J2.19 RN2.8 | length 1535.8
  Top Layer w10: J2.19 2917.13,2540.62 2940.75,2564.24 v1(2940.75,2596.72) ; v1(3942.72,2338.84) RN2.8
  Bottom Layer w10: v1(2940.75,2596.72) 2940.75,2625.26 3000.42,2684.93 3904.64,2684.93 3942.72,2646.85 v1(3942.72,2338.84)
HDMI_SCL: R12.2 U1.124 | length 930.9
  Top Layer w10: U1.124 3315.77,2002.21 v1(3322.64,1995.34) ; R12.2 3299.88,2749.4 3323.75,2725.53 3323.75,2709.9 ; v1@3323.75,2646.17 3323.75,2709.9 ; 3323.75,2694.28 3323.75,2709.9
  Bottom Layer w10: v1(3322.64,1995.34) 3323.98,1996.69 v1@3323.98,2644.95
  other v1: 3323.98,2645.93
HDMI_SDA: R13.2 U1.123 | length 692.4
  Top Layer w10: U1.123 3291.17,1982.52 v1@3300,1973.69 ; v5@3267.38,2503.41 v5(3268.5,2502.28) ; v5@3268.38,2504.41 R13.2
  Bottom Layer w10: v5(3268.5,2502.28) 3299.64,2471.15 3299.64,1975.03 v1(3300.98,1973.69)
HDMI_TX0_N: J2.9 U1.3 | length 864.1
  Top Layer w7: J2.9 2720.28,2437.38 2707.59,2424.69 2707.59,2407.21 2714.92,2399.88 2852.12,2399.88 ccw(c2852.12,2406.88) 2859.12,2406.88 2859.12,2408.88 cw(c2880.12,2408.88) 2901.12,2408.88 2901.12,2376.88 ccw(c2908.12,2376.88) 2915.12,2376.88 2915.12,2408.88 cw(c2936.12,2408.88) 2957.12,2408.88 2957.12,2406.88 ccw(c2964.12,2406.88) 2964.12,2399.88 3032.92,2399.88 3053.93,2378.87 ccw(c3058.88,2383.82) 3063.83,2378.87 3068.78,2383.82 cw(c3073.73,2378.87) 3078.68,2383.82 cw(c3073.73,2378.87) 3078.68,2373.92 3073.73,2368.97 ccw(c3078.68,2364.02) 3073.73,2359.07 3076.02,2356.78 3110.08,2322.72 3110.08,2196.22 3112.92,2193.38 U1.3
HDMI_TX0_P: J2.7 U1.4 | length 864.1
  Top Layer w7: J2.7 2680.91,2437.38 2693.59,2424.69 2693.59,2401.41 2709.12,2385.88 2807.43,2385.88 2814.43,2385.88 2821.43,2385.88 cw(c2821.43,2378.88) 2828.43,2378.88 2828.43,2371.95 ccw(c2835.43,2371.95) 2835.43,2364.95 ccw(c2835.43,2371.95) 2842.43,2371.95 2842.43,2379.2 cw(c2849.12,2379.2) 2849.12,2385.88 2852.12,2385.88 ccw(c2852.12,2406.88) 2873.12,2406.88 2873.12,2408.88 cw(c2880.12,2408.88) 2887.12,2408.88 2887.12,2376.88 ccw(c2908.12,2376.88) 2929.12,2376.88 2929.12,2408.88 cw(c2936.12,2408.88) 2943.12,2408.88 2943.12,2406.88 ccw(c2964.12,2406.88) 2964.12,2385.88 3027.12,2385.88 3096.08,2316.92 3096.08,2196.22 3093.24,2193.38 U1.4
HDMI_TX1_N: J2.6 U1.5 | length 864.1
  Top Layer w7: J2.6 2661.22,2437.38 2648.54,2424.69 2648.54,2400.88 ccw(c2655.54,2400.88) 2655.54,2393.88 2667.99,2393.88 cw(c2667.99,2386.88) 2674.99,2386.88 cw(c2667.99,2386.88) 2667.99,2379.88 2654.54,2379.88 ccw(c2654.54,2373.88) 2648.54,2373.88 2648.54,2348.47 2656.12,2340.88 2690.14,2340.88 cw(c2711.12,2339.88) 2732.12,2339.88 2732.12,2327.88 ccw(c2739.12,2327.88) 2746.12,2327.88 2746.12,2339.88 cw(c2767.12,2339.88) 2788.09,2340.88 3032.92,2340.88 3070.71,2303.09 3070.71,2196.22 3073.55,2193.38 U1.5
HDMI_TX1_P: J2.4 U1.6 | length 864.1
  Top Layer w7: J2.4 2621.85,2437.38 2634.54,2424.69 2634.54,2393.88 2634.54,2386.88 2634.54,2379.88 cw(c2627.54,2379.88) 2627.54,2372.88 2615.27,2372.88 ccw(c2615.27,2365.88) 2608.27,2365.88 ccw(c2615.27,2365.88) 2615.27,2358.88 2627.54,2358.88 cw(c2627.54,2351.88) 2634.54,2351.88 2634.54,2342.88 2634.54,2342.67 2650.32,2326.88 2691.12,2326.88 ccw(c2691.12,2339.88) 2704.12,2339.88 cw(c2711.12,2339.88) 2718.12,2339.88 2718.12,2327.88 ccw(c2739.12,2327.88) 2760.12,2327.88 2760.12,2339.88 cw(c2767.12,2339.88) 2774.12,2339.88 ccw(c2787.12,2339.88) 2787.12,2326.88 3027.12,2326.88 3056.71,2297.29 3056.71,2196.22 3053.87,2193.38 U1.6
HDMI_TX2_N: J2.3 U1.7 | length 864.1
  Top Layer w7: J2.3 2602.17,2437.38 2589.48,2424.69 2589.48,2324.32 2628.92,2284.88 2650.75,2284.88 ccw(c2650.75,2291.88) 2657.75,2291.88 2657.75,2293.9 cw(c2664.75,2293.9) 2664.75,2300.9 cw(c2664.75,2293.9) 2671.75,2293.9 2671.75,2291.88 ccw(c2678.75,2291.88) 2678.75,2284.88 2696.12,2284.88 2771.12,2284.88 cw(c2771.12,2263.88) 2792.12,2263.88 2792.12,2261.88 ccw(c2799.12,2261.88) 2806.12,2261.88 2806.12,2263.88 cw(c2827.12,2263.88) 2848.12,2263.88 2848.12,2261.88 ccw(c2855.12,2261.88) 2862.12,2261.88 2862.12,2263.88 cw(c2883.12,2263.88) 2904.12,2263.88 2904.12,2261.88 ccw(c2911.12,2261.88) 2918.12,2261.88 2918.12,2263.88 cw(c2939.12,2263.88) 2939.12,2284.88 2977.12,2284.88 3031.34,2230.66 3031.34,2196.22 3034.18,2193.38 U1.7
HDMI_TX2_P: J2.1 U1.8 | length 864.1
  Top Layer w7: J2.1 2562.8,2437.38 2575.48,2424.69 2575.48,2318.52 2623.12,2270.88 2688.55,2270.88 2695.55,2270.88 2702.55,2270.88 cw(c2702.55,2263.88) 2709.55,2263.88 2709.55,2261.86 ccw(c2716.55,2261.86) 2716.55,2254.86 ccw(c2716.55,2261.86) 2723.55,2261.86 2723.55,2263.88 cw(c2730.55,2263.88) 2730.55,2270.88 2741.12,2270.88 2771.12,2270.88 cw(c2771.12,2263.88) 2778.12,2263.88 2778.12,2261.88 ccw(c2799.12,2261.88) 2820.12,2261.88 2820.12,2263.88 cw(c2827.12,2263.88) 2834.12,2263.88 2834.12,2261.88 ccw(c2855.12,2261.88) 2876.12,2261.88 2876.12,2263.88 cw(c2883.12,2263.88) 2890.12,2263.88 2890.12,2261.88 ccw(c2911.12,2261.88) 2932.12,2261.88 2932.12,2263.88 cw(c2939.12,2263.88) 2939.12,2270.88 2971.32,2270.88 3017.34,2224.86 3017.34,2196.22 3014.5,2193.38 U1.8
I2S1_LRCK: U1.110 U2.3 | length 254.8
  Top Layer w10: U1.110 3314.74,1726.62 v1(3327.56,1739.43) ; v1(3374.11,1692.88) U2.3
  Bottom Layer w10: v1(3327.56,1739.43) v1(3374.11,1692.88)
I2S1_MCLK: U1.108 U2.4 | length 248.5
  Top Layer w10: U1.108 3327.58,1687.25 3371.94,1642.88 3375.79,1642.88 U2.4
I2S1_SCLK: U1.109 U2.2 | length 245.1
  Top Layer w10: U1.109 3329.5,1706.93 3365.46,1742.88 U2.2
I2S1_SDATA: U1.111 U2.1 | length 249.5
  Top Layer w10: U1.111 3298.01,1746.3 3344.59,1792.88 U2.1
LCD25: K1.37 U7.2 | length 806
  Top Layer w7: U7.2 2764.8,1011.98 2775.1,1001.69 2775.1,978.61 2790.71,963 2801.48,963 2801.79,963.31 3087.86,963.31 3088.17,963 3149.79,963 3173.03,986.24 K1.37
LCD26: K1.40 U7.5 | length 744.7
  Top Layer w7: U7.5 2804.03,1088.76 2819.79,1073 2819.79,1018 2835.48,1002.31 3096.1,1002.31 3113.98,1020.19 K1.40
LCD27: K1.39 U7.4 | length 767.1
  Top Layer w7: U7.4 2788.62,1063.17 2801.79,1050 2801.79,1003 2815.48,989.31 3115.1,989.31 3133.66,1007.87 K1.39
LCD28: K1.38 U7.3 | length 791.7
  Top Layer w7: U7.3 2779.44,1037.57 2788.1,1028.92 2788.1,984 2796.09,976 2796.4,976.31 3093.25,976.31 3093.56,976 3130.79,976 3153.35,998.56 K1.38
LCD_A: D1.K K1.2 U5.5 | length 6042.7
  Top Layer w10: K1.2 3862.01,1359.22 v2(3888.79,1386)
  Top Layer w15: D1.K 1754.49,2285.2 1779.33,2310.04 1779.33,2421.39 1769.51,2431.21 U5.5
  Top Layer w30: v3(1720.28,2189.96) 1720.28,2284.72 D1.K
  Bottom Layer w30: v3(1720.28,2189.96) 1844.83,2189.96 1905.79,2129 1905.79,1032 1964.79,973 2152.79,973 2200.79,925 2200.79,536 2276.79,460 4208,460 4305.46,557.46 4305.46,1393.91 4269.37,1430 3930.79,1430 v2@3893.79,1393
LCD_CS: P4.1 U1.50 | length 7466.1
  Top Layer w7: U1.50 2322.08,1864.41 2229.6,1956.9 937.69,1956.9 895.79,1915 895.79,65.83 938.98,22.64 4503.62,22.64 4534.65,53.67 4534.65,313.2 4556.1,334.65 P4.1
LCD_DB0: K1.5 U1.93 | length 1159
  Top Layer w7: U1.93 2975.13,1471.66 2984.79,1462 3782.79,1462 3802.95,1441.83 K1.5
LCD_DB1: K1.6 U1.92 | length 1166.6
  Top Layer w7: U1.92 2955.44,1457.35 2963.79,1449 3774.79,1449 3783.27,1440.52 K1.6
LCD_DB2: K1.7 U1.91 | length 1166.4
  Top Layer w7: U1.91 2935.76,1447.03 2946.79,1436 3757.38,1436 3763.58,1429.8 K1.7
LCD_DB3: K1.8 U1.90 | length 1161.4
  Top Layer w7: U1.90 2916.07,1431.72 2924.79,1423 3726.79,1423 3743.9,1405.89 K1.8
LCD_DB4: K1.9 U1.89 | length 1154.9
  Top Layer w7: U1.89 2896.39,1423.4 2909.79,1410 3700.79,1410 3724.21,1386.57 K1.9
LCD_DB5: K1.10 U1.88 | length 1700.2
  Top Layer w7: U1.88 2876.7,1588.91 v1@2897.79,1610 ; v1(3646.79,963) 3704.53,1020.74 K1.10
  Bottom Layer w7: v1(2898.79,1610) 2897.79,1610 2875.79,1588 2875.79,1063.5 2886.79,1052.5 3557.29,1052.5 v1(3646.79,963)
LCD_DB6: K1.11 U1.87 | length 1674.2
  Top Layer w7: U1.87 v1@2857.02,1609.23 ; v1(3612.79,963) 3684.84,1035.06 K1.11
  Bottom Layer w7: v1(2858.79,1611) 2859.29,1610.5 2859.29,1431.59 2858.79,1431.09 2858.79,1058 2877.29,1039.5 3536.29,1039.5 v1(3612.79,963)
LCD_DB7: K1.12 U1.86 | length 1490
  Top Layer w10: v1@2837.33,1441.46 U1.86 ; v1(3573.79,963) 3665.16,1054.37 K1.12
  Bottom Layer w10: v1(2837.79,1441) 2837.79,1046 2858.79,1025 3511.79,1025 v1(3573.79,963)
LCD_DB8: K1.13 U1.83 | length 1528.6
  Top Layer w7: v1@2778.28,1432.51 U1.83 ; v1(3531.79,962) 3645.47,1075.69 K1.13
  Bottom Layer w7: v1(2780.79,1431) 2780.79,1022 2792.29,1010.5 3483.29,1010.5 v1(3531.79,962)
LCD_DB9: K1.14 U1.82 | length 1730.7
  Top Layer w7: v1(3496.79,962) 3625.79,1091 K1.14
  Top Layer w10: U1.82 2758.59,1580.8 2767.79,1590 v1(2767.79,1617)
  Bottom Layer w7: v1(2767.79,1617) 2767.79,1590 2758.79,1581 2758.79,1012.5 2773.79,997.5 3426.08,997.5 3426.58,997 3461.79,997 v1(3496.79,962)
LCD_DB10: K1.15 U1.81 | length 1505.1
  Top Layer w7: v1(2735.79,1452) 2738.91,1455.12 U1.81 ; v1@3456.79,963 3606.1,1112.31 K1.15
  Bottom Layer w7: v1(2735.79,1452) 2735.79,1397.87 2738.91,1394.76 2738.91,1012.88 2767.29,984.5 3420.69,984.5 3443.19,962
  other v1: 3456.79,962
LCD_DB11: K1.16 U1.80 | length 1697.3
  Top Layer w10: v1(2717.79,1616) 2719.22,1614.57 U1.80 ; v1(3411.79,963) 3417.79,963 3586.42,1131.63 K1.16
  Bottom Layer w10: v1@2712.79,1611 2712.79,1415.96 2719.22,1409.53 2719.22,1007.57 2764.79,962 v1@3410.79,962
LCD_DB12: K1.17 U1.79 | length 1204.3
  Top Layer w7: U1.79 2699.54,1395.82 2705.51,1389.84 3552.94,1389.84 3566.73,1376.06 K1.17
LCD_DB13: K1.18 U1.78 | length 1203.5
  Top Layer w7: U1.78 2679.85,1387.87 2690.87,1376.84 3536.94,1376.84 3547.05,1366.74 K1.18
LCD_DB14: K1.19 U1.77 | length 1201.4
  Top Layer w7: U1.77 2660.17,1376.06 2672.38,1363.84 3514.94,1363.84 3527.36,1351.43 K1.19
LCD_DB15: K1.20 U1.76 | length 1197.4
  Top Layer w7: U1.76 2640.48,1364.69 2654.33,1350.84 3489.94,1350.84 3507.68,1333.11 K1.20
LCD_DB16: K1.21 U1.75 | length 1203.1
  Top Layer w7: U1.75 2620.8,1348.5 2631.45,1337.84 3476.94,1337.84 3487.99,1326.8 K1.21
LCD_DB17: K1.22 U1.74 | length 1199.9
  Top Layer w7: U1.74 2601.11,1338.69 2614.96,1324.84 3454.94,1324.84 3468.31,1311.48 K1.22
LCD_DB18: K1.23 U1.71 | length 1239.7
  Top Layer w7: U1.71 2542.06,1321.76 2551.97,1311.84 3431.94,1311.84 3448.62,1295.17 K1.23
LCD_DB19: K1.24 U1.70 | length 1238.3
  Top Layer w7: U1.70 2522.37,1308.76 2532.28,1298.84 2759.79,1298.84 3409.94,1298.84 3428.94,1279.85 K1.24
LCD_DB20: K1.25 U1.69 | length 1240.5
  Top Layer w7: U1.69 2502.69,1295.76 2512.6,1285.84 3393.94,1285.84 3409.25,1270.54 K1.25
LCD_DB21: K1.26 U1.68 | length 1242
  Top Layer w7: U1.68 2483,1282.76 2492.91,1272.84 3376.94,1272.84 3389.57,1260.22 K1.26
LCD_DB22: K1.27 U1.67 | length 1244
  Top Layer w7: U1.67 2463.32,1272.13 2475.61,1259.84 3362.94,1259.84 3369.88,1252.91 K1.27
LCD_DB23: K1.28 U1.66 | length 1242.9
  Top Layer w7: U1.66 2443.63,1260.58 2458.93,1245.28 3344.5,1245.28 3350.2,1239.59 K1.28
LCD_DOTCLK: K1.30 P4.6 U1.96 | length 2521.3
  Top Layer w7: U1.96 3034.18,1584.39 v1(3052.79,1603) ; v1@3310.83,1112.04 K1.30 ; v1(4193.79,856) 4659.55,856 P4.6
  Bottom Layer w7: 3034.79,1576.38 3034.79,1125 3047.79,1112 3308.79,1112 v1(3309.79,1111) 4141.79,1111 4164.79,1088 4164.79,981 4191.79,954 4191.79,854 v1@4190.79,853 ; 3039.79,1576.38 3052.79,1589.38 v1(3052.79,1603)
LCD_ENABLE: K1.34 P4.5 U1.94 | length 2741.1
  Top Layer w7: v1@2959.79,1603 2994.81,1567.98 U1.94 ; v1(3198.79,1076) 3232.09,1109.3 K1.34 ; v1(4136.79,827) 4136.79,761 4163.14,734.65 P4.5
  Bottom Layer w7: v1(2959.79,1609) 2959.79,1100 2984.79,1075 v1@3197.79,1075 ; v1(3198.79,1076) 3209.29,1065.5 4113.29,1065.5 4136.79,1042 v1@4136.79,838
LCD_HSYNC: K1.32 P4.7 U1.95 | length 2488
  Top Layer w7: v1(2991.79,1603) 3014.5,1580.29 U1.95 ; v1(3268.79,1089) 3271.46,1091.67 K1.32 ; v1(4160.79,951) 4177.14,934.65 P4.7
  Bottom Layer w7: v1(2991.79,1603) 2991.79,1118 3010.79,1099 3206.19,1099 3216.19,1089 v1(3268.79,1089) 4128.79,1089 4149.79,1068 4149.79,962 v1(4160.79,951)
LCD_K: K1.1 R10.1 R11.1 U5.3 | length 5747.9
  Top Layer w10: K1.1 3939.05,1171.26 3955.79,1188 v2(3955.79,1314)
  Top Layer w30: U5.3 1954.35,2468.61 R11.1@1954.35,2527.61 ; v3(1954.53,2393.7) 1954.53,2468.78 R10.1
  Bottom Layer w30: v3(1954.53,2393.7) 1954.53,1081.26 2026.79,1009 2167.7,1009 2248.79,927.91 2248.79,569 2321.79,496 4193.09,496 4269.46,572.37 4269.46,1351.33 4232.79,1388 3978.79,1388 3955.79,1365 v2(3955.79,1314)
LCD_RST: K1.31 P4.4 U1.65 | length 8307.6
  Top Layer w7: K1.31 3291.14,1221.65 3280.5,1232.28 2453.54,1232.28 2423.94,1261.88 U1.65 1030.71,1519.92 965.79,1455 965.79,116.89 1021.04,61.64 4463.64,61.64 4481.3,79.3 4481.3,620.08 4495.87,634.65 P4.4
LCD_SCLK: P4.2 U1.51 | length 7491.3
  Top Layer w7: U1.51 2321.78,1844.73 2222.61,1943.9 959.69,1943.9 915.79,1900 915.79,89.13 969.28,35.64 4498.24,35.64 4521.65,59.06 4521.65,420.28 4536.02,434.65 P4.2
LCD_SDI: P4.3 U1.52 | length 7504.9
  Top Layer w7: U1.52 2323.08,1825.04 2217.32,1930.8 986.58,1930.8 945.79,1890 945.79,95.55 992.7,48.64 4480.72,48.64 4499.02,66.93 4499.02,522.64 4511.02,534.65 P4.3
LCD_VSYNC: K1.33 P4.8 U1.97 | length 2552.7
  Top Layer w7: U1.97 3053.87,1567.92 v1@3086.79,1600.84 ; v1(3066.79,1204) 3081.79,1219 3239.79,1219 3251.77,1207.02 K1.33 ; v1(4194.79,1053) 4213.14,1034.65 P4.8
  Bottom Layer w7: v1(3066.79,1204) 3066.79,1585 v1(3086.79,1605) ; 3066.79,1267 4162.79,1267 4177.79,1252 4177.79,1070 v1(4194.79,1053)
NetCT1_1: CT1.1 U2.8 | length 106.5
  Top Layer w15: U2.8 CT1.1
NetCT2_1: CT2.1 U2.5 | length 106.5
  Top Layer w15: U2.5 CT2.1
NetD1_A: D1.A L1.2 U5.1 | length 311
  Top Layer w30: U5.1 1827.69,2319.21 D1.A L1.2@1861.7,2096.94
NetJ2_15: J2.15 R12.1 R15.1 | length 611.5
  Top Layer w8: R15.1 R12.1
  Top Layer w10: J2.15 2838.39,2641.01 2882.11,2684.73 R15.1
NetJ2_16: J2.16 R13.1 R14.1 | length 597.3
  Top Layer w10: J2.16 2858.07,2630.18 2893.5,2665.62 3173.16,2665.62 R14.1 R13.1@3218.71,2554.51
NetL3_2: L3.2 U8.3 | length 176.5
  Top Layer w30: U8.3 2518.48,342.74 L3.2
NetP2_1: P2.1 R2.2 | length 144.1
  Top Layer w7: v1(1625.79,1623.03) 1626.77,1624.02 R2.2
  Bottom Layer w7: P2.1 v1(1625.79,1623.03)
NetP2_2: P2.2 R1.2 | length 149.3
  Top Layer w7: v1(1623.43,1723.03) 1699.02,1723.03 R1.2
  Bottom Layer w7: P2.2 v1(1623.43,1723.03)
NetR1_1: R1.1 U1.58 | length 628.2
  Top Layer w7: R1.1@1751.77,1716.54 1755.71,1720.47 v1(2079.53,1720.47) ; v1(2254.72,1720.47) 2268.27,1706.93 U1.58
  Bottom Layer w7: v1(2079.53,1720.47) v1(2254.72,1720.47)
NetR2_1: R2.1 U1.59 | length 688.1
  Top Layer w7: R2.1 2034.8,1624.02 2047.05,1636.26 v1(2047.05,1690.94) ; v1(2234.16,1692.01) 2238.93,1687.25 U1.59
  Bottom Layer w7: v1(2047.05,1690.94) 2233.1,1690.94 v1(2234.16,1692.01)
NetR7_2: R7.2 U1.2 | length 195.8
  Top Layer w12: U1.2 3132.61,2283.65 3155.12,2306.17 R7.2
NetR16_2: R16.2 R17.2 U8.5 | length 168.1
  Top Layer w20: U8.5 2293.93,212.96 2310.04,196.85 R16.2 2329.73,194.88 R17.2
OUT_L: C8.2 C9.2 CT1.2 P1.2 | length 1591.5
  Top Layer w15: P1.2 3731.1,2614.43 3760.14,2643.47 C8.2 C9.2 4101.31,2643.47 4122.83,2621.95 4122.83,1813.05 4100.79,1791 3845.88,1791 3844.01,1792.87 CT1.2
OUT_R: C10.2 C11.2 CT2.2 P1.3 | length 2054.9
  Top Layer w15: P1.3 3477.25,2717.29 C10.2 C11.2 4112.49,2717.29 4144.49,2685.3 4144.49,1679.7 4107.65,1642.87 CT2.2
POWER_EN: R9.1 U1.54 U5.4 | length 2001.2
  Top Layer w10: R9.1 v1@1563.2,2449.6 ; v1(1592.32,1905.51) 2211.61,1905.51 2236.02,1881.1 2236.02,1840.55 2290.9,1785.67 U1.54 ; U5.4 v1(1733.2,2511.94)
  Bottom Layer w10: v1(1562.99,2449.8) 1562.87,2449.92 1471.46,2449.92 ; v1(1592.32,1905.51) 1507.87,1905.51 1471.46,1941.93 1471.46,2449.92 ; v1(1733.2,2511.94) 1488.32,2511.94 1471.46,2495.08 1471.46,2449.92
RESET: RN2.6 U1.125 | length 1028.6
  Top Layer w7: U1.125 v1(3359.03,2021.89) ; v1(3879.72,2338.84) RN2.6
  Bottom Layer w7: v1(3359.03,2021.89) 3359.03,2326.02 3371.85,2338.84 v1(3879.72,2338.84)
SCL: R3.1 U1.56 U3.6 | length 834.9
  Top Layer w7: R3.1 2099.21,2270.69 2099.21,2164.11 2149.44,2113.88 U3.6 v1@2291.43,2113.88 ; v1(2205.51,1871.06) 2205.51,1843.61 2302.82,1746.3 U1.56
  Bottom Layer w7: v1(2205.51,1871.06) 2205.51,2026.57 v1(2292.13,2113.19) v1@2292.13,2114.17
SDA: R4.1 U1.57 U3.5 | length 853.6
  Top Layer w7: R4.1 2083.46,2234.31 2083.46,2118.11 2137.69,2063.88 U3.5 2208.59,2027.69 2173.03,1992.13 v1(2173.03,1990.16) ; v1(2173.03,1872.05) 2173.03,1848.43 2294.84,1726.62 U1.57 2317.48,1726.62
  Bottom Layer w7: v1(2173.03,1872.05) v1(2173.03,1990.16)
SDIN: RN1.2 U4.5 | length 337.3
  Top Layer w7: RN1.2@3477.95,1906.78 v1(3519.51,1906.78) ; v1@3743.29,1874.88 U4.5
  Bottom Layer w7: v1(3519.51,1906.78) 3551.03,1875.26 v1(3742.91,1875.26)
SDOUT: RN1.3 U4.2 | length 148.9
  Top Layer w7: RN1.3@3477.95,1938.28 3520.5,1938.28 3556.24,1974.02 3557.1,1974.88 U4.2
SW_PB: Button1.3 R8.1 U1.53 | length 1659.9
  Top Layer w10: Button1.3 1578.85,2803.83 1612.3,2770.38 R8.1 ; v1(1612.01,2665.35) R8.1@1612.01,2736.59 ; v1(2265.55,1850.39) 2261.61,1850.39 2260.63,1851.38 2262.6,1853.35 2310.59,1805.36 U1.53
  Bottom Layer w10: v1(1612.01,2665.35) 1646.65,2665.35 1781.5,2530.51 2006.69,2530.51 2032.28,2504.92 2032.28,1936.02 2119.88,1848.43 2119.52,1848.06 2263.22,1848.06 v1(2265.55,1850.39)
WP: R6.1 U4.3 | length 461.3
  Top Layer w7: v1@3556.89,1924.88 U4.3 ; v1(3897.21,1892.22) 3908.14,1881.29 R6.1
  Bottom Layer w7: v1(3555.91,1925.46) 3863.98,1925.46 v1(3897.21,1892.22)
XI: C14.1 R5.1 U1.128 Y1.2 | length 534.3
  Top Layer w10: U1.128 3361.18,2080.95 Y1.2 3534.71,2254.47 C14.1 R5.1
XO: C13.1 R5.2 U1.127 Y1.1 | length 875.8
  Top Layer w10: U1.127 3396.43,2061.26 3454.53,2119.36 3739.59,2119.36 Y1.1 3730.53,2245.47 C13.1 R5.2
pads on no net: Button1.0 J2.13 J2.14 J2.20@3025.39,2757.17 J2.21@2454.53,2757.17 J2.22@3025.39,2522.52 J2.23@2454.53,2522.52 K1. P1.10 P1.11 P1.MH1 P1.MH2 P3.2 P3.3 P3.4 P3.6@1786.22,2825.2 P3.6@2008.66,2825.2 P3.7 U1.12 U1.13 U1.14 U1.15 U1.16 U1.17 U1.18 U1.19 U1.21 U1.22 U1.24 U1.25 U1.26 U1.27 U1.28 U1.29 U1.30 U1.31 U1.32 U1.33 U1.34 U1.35 U1.36 U1.37 U1.39 U1.40 U1.41 U1.42 U1.43 U1.44 U1.45 U1.46 U1.47 U1.48 U1.55 U1.63 U1.64 U1.72 U1.98 U1.99 U1.100 U1.101 U1.102 U1.103 U1.104 U1.105 U1.112 U1.113 U1.114 U1.119 U1.121 U1.122 U1.126 U7.13 U9.

## Keep-outs
Keep-Out Layer:
  lines w10: 4850,2898.88 4850,0 0,0 0,2898.88 1735.96,2898.88 1751.54,2883.3 2044.02,2883.3 2059.6,2898.88 4850.12,2898.88 ; 1040,541 1040,760 1495,760 1495,543 1493,541 1040,541 ; 3085,536 3965,536 3965,936 3085,936 3085,536

## Silkscreen, mask and mechanical layers (free items; w line width, h text height)
Top Overlay:
  text "UC-453" at 4408.46,2380.91 h120
  text "GND" at 4477.17,1115.16 h60
  text "VSYNC" at 4433.86,1012.8 h60
  text "HSYNC" at 4434.84,917.32 h60
  text "DOTCLK" at 4404.33,814.96 h60
  text "ENABLE" at 4403.35,715.55 h60
  text "3.3V SDA SCL IO7" at 1732.79,648 h60
  text "MOSI MISO SCLK GND" at 2494.79,643 h60
  text "RST" at 4475.2,616.14 h60
  text "5V 5V GND IO15" at 1745.79,593 h60
  text "GND IRQ T_CS L_CS" at 2526.79,588 h60
  text "SDI" at 4485.04,515.75 h60
  text "SCLK" at 4452.56,413.39 h60
  text "CS" at 4503.74,312.01 h60
Bottom Overlay:
  lines w7.87: 1880.71,1282.48 1880.71,1315.94 ; 1880.71,1447.83 1880.71,1470.47
Mechanical 1:
  lines w10: 4007.62,2898.88 4850,2898.88 4850,0 0,0 0,2898.88 1735.96,2898.88 1751.54,2883.3 2044.02,2883.3 2059.6,2898.88 4850.12,2898.88 ; 1040,541 1493,541 1495,543 1495,760 1040,760 1040,541 ; 3084,536 3965,536 3965,936 3085,936 3085,537 3084,536

## Text inside footprints (layer, text, board x,y; h text height)
K1: Top Overlay "1" at 3871.85,1230.31 h60; Top Overlay "40" at 3104.13,1230.31 h60
U9: Top Overlay "10" at 1340.08,1012.28 h60; Top Overlay "1" at 1166.38,1011.34 h60